# EAGLE board PCB_Accessoire_Puissance_ED0B (EAGLE 9.6.0)
AUTHOR: Alexandre LEMAIRE; PCB_DESCRIPTION: PCB; PCB_REV: 0
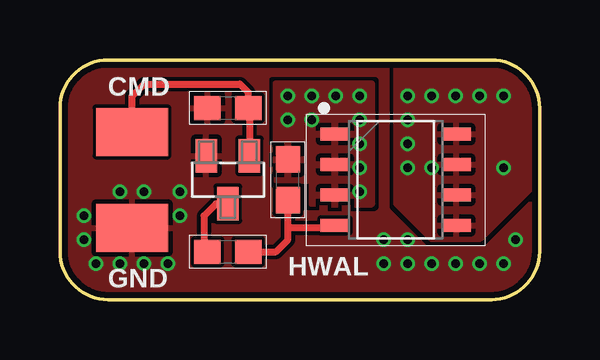
[diagram p0: board, top side]
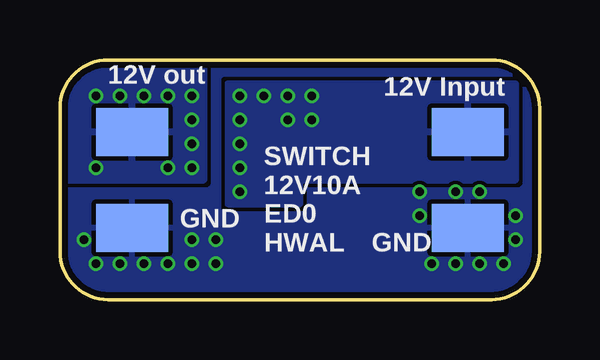
[diagram p1: board, bottom side, seen from below]

Size 20 x 10 mm. Coordinates in mm from the lower left corner, seen from the top.
Outline: 2,0 18,0 arc90 20,2 20,8 arc90 18,10 2,10 arc90 0,8 0,2 arc90 2,0
Copper layers (1*16): Top 0.018mm / dielectric 1.55mm / Bottom 0.018mm
Design rules "eC_2Layer_PClass6_BaseCopperO18_eCDefault *": minimum track width 0.15mm, minimum drill 0.35mm, track to track 0.15mm, track to pad 0.15mm, pad to pad 0.15mm, via to via 0.15mm, smd to smd 0mil, copper to edge 0.25mm, drill to drill 0.35mm, minimum pad ring 0.175mm, minimum via ring 0.125mm, stop-mask expansion 0mil, vias tented up to drill 0.45mm, thermal gap 0.2mm

## Footprints (pad centres in the part's own frame; a part is rotated, then mirrored left to right if it is on the bottom)
PAD_2X3MM = smd 2 x 3: 1 0,0
R0603 = smd 1.1 x 1: 1 -0.85,0; 2 0.85,0
SOT23 = smd 0.9 x 1.4: 1 -0.9,-1; 2 0.9,-1; 3 0,1
SOIC8 = smd 1.197 x 0.559: 1 -2.527,1.905; 2 -2.527,0.635; 3 -2.527,-0.635; 4 -2.527,-1.905; 5 2.527,-1.905; 6 2.527,-0.635; 7 2.527,0.635; 8 2.527,1.905

## Placement (x,y rotation side)
J1  PAD  [PAD_2X3MM]  3,7 90 bottom
J2  PAD  [PAD_2X3MM]  17,7 90 bottom
J3  PAD  [PAD_2X3MM]  17,3 90 bottom
J4  PAD  [PAD_2X3MM]  3,3 90 bottom
J5  PAD  [PAD_2X3MM]  3,7 90 top
J6  PAD  [PAD_2X3MM]  3,3 90 top
R1  10k  [R0603]  9.5,5 90 top
R11  510R  [R0603]  7,2 0 top
R26  10k  [R0603]  7,8 0 top
TR1  TSM2312  [SOT23]  7,5 180 top
TR2  SI4435DDY-T1-GE3  [SOIC8]  14,5 0 top

## Library data of the parts
J1-J6 = LMK_Connectique_PAD_CMS; MAJ_DATE: 22/08/2019; MAJ_ID: AL; POPULATED: NO
R1 R26 = LMK_RES_0603; FARNELL: 2689413; FARNELL_PRICE: 0,0041; MAJ_DATE: 07/17; MAJ_ID: AL; MF: MULITCOMP; POPULATED: YES; POWER: 0.1W; REF_MF: MCWR06X103 JTL
R11 = LMK_RES_0603; DIGIKEY: 311-510HRTR-ND; FARNELL: 2413712; MF: YAGEO; MOUSER: 603-RC0603FR-07510RL; POPULATED: YES; POWER: 1/10W; REF_MF: RC0603FR-07510RL; RS: 504-7571
TR1 = LMK_MOS_N; DIGIKEY: TSM2312CX RFGCT-ND; DIGIKEY_PRICE: 0,463; FARNELL: 1864587; FARNELL_PRICE: 0,355; MAJ_DATE: 31/08/17; MAJ_ID: AL; MF: Taiwan Semiconductor; POPULATED: YES; REF_MF: TSM2312CX; RS: 7436059; RS_PRICE: 0,123; TME: TSM2312CX; TME_PRICE: 0,201
TR2 = LMK_MOS_P; DIGIKEY: SI4435DDY-T1-E3CT-ND; DIGIKEY_PRICE: 0,681; FARNELL: 2101446; FARNELL_PRICE: 0,82; HEIGHT: 1.75mm; MAJ_DATE: 25/09/17; MAJ_ID: AL; MF: Vishay; MOUSER: 781-SI4435DDY-T1-E3; MOUSER_PRICE: 0,639; POPULATED: YES; REF_MF: SI4435DDY-T1-GE3; RS: 7103339

## Nets
12V_INPUT: J1.1 R1.2 TR2.1 TR2.2 TR2.3
12V_OUTPUT: J2.1 TR2.5 TR2.6 TR2.7 TR2.8
CMD_SWITCH: J5.1 R26.2 TR1.1
G_MOSP: R1.1 R11.2 TR2.4
GND: J3.1 J4.1 J6.1 R26.1 TR1.2
N$4: R11.1 TR1.3

## Tracks (layer width: path | path; a pad name or v marks a point on that pad's centre or on a via)
12V_INPUT  (via drill 0.35)
  other vias: 9.5,8.5 10.5,8.5 11.5,8.5 12.5,8.5 9.5,7.5 10.5,7.5 12.5,7.5 12.5,6.5 12.5,5.5 12.5,4.5
  pour Top: 13,4 13,9 9,9 9,5 10.5,5 10.5,4
  pour Bottom: 1,9 13,9 13,4 10,4 10,5 1,5
12V_OUTPUT  (via drill 0.35)
  other vias: 14.5,8.5 15.5,8.5 16.5,8.5 17.5,8.5 14.5,7.5 14.5,6.5 14.5,5.5 15.5,5.5 18.5,5.5 18.5,8.5
  pour Top: 14,10 20,10 20,5 17.5,2.5 15.5,2.5 14,4
  pour Bottom: 14,10 20,10 20,5 14,5
CMD_SWITCH
  Top 0.3: J5.1 3,8.5 3.5,9 7.5,9 7.85,8.65 R26.2 7.9,7.95 TR1.1
G_MOSP
  Top 0.3: R11.2 9,2 9.5,2.5 9.5,3 | 9.5,3 R1.1 | TR2.4 11.38,3 9.5,3
GND  (via drill 0.35)
  other vias: 18.5,1.5 17.5,1.5 16.5,1.5 15.5,1.5 14.5,2.5 14.5,1.5 19,2.5 1.5,1.5 2.5,1.5 3.5,1.5 4.5,1.5 1,2.5 1,3.5 5,3.5 5,4.5 3.5,4.5 2.5,4.5 13.5,2.5 13.5,1.5
  pour Top (rank 6): -1,-1 21,-1 21,28 -1,28
  pour Bottom (rank 6): -2,-2 20,-2 20,29 -2,29
N$4
  Top 0.3: TR1.3 6.5,4 6,3.5 6,2.15 R11.1

## Text on the board
tPlace: CMD | HWAL | GND
bPlace: 12V out | 12V Input | GND | GND | SWITCH / 12V10A / ED0 / HWAL